# Altium PCB RelayBord.PcbDoc (part 1 of 2)
Units mm, origin at the board's own origin, x right, y up, seen from the top; angles counter-clockwise.
Board outline 155 x 100 mm, 2 copper layers (Top Layer, Bottom Layer); 259 components, 185 nets, 772 pads, 92 vias.
Unrouted connection lines stored in the file: 1.
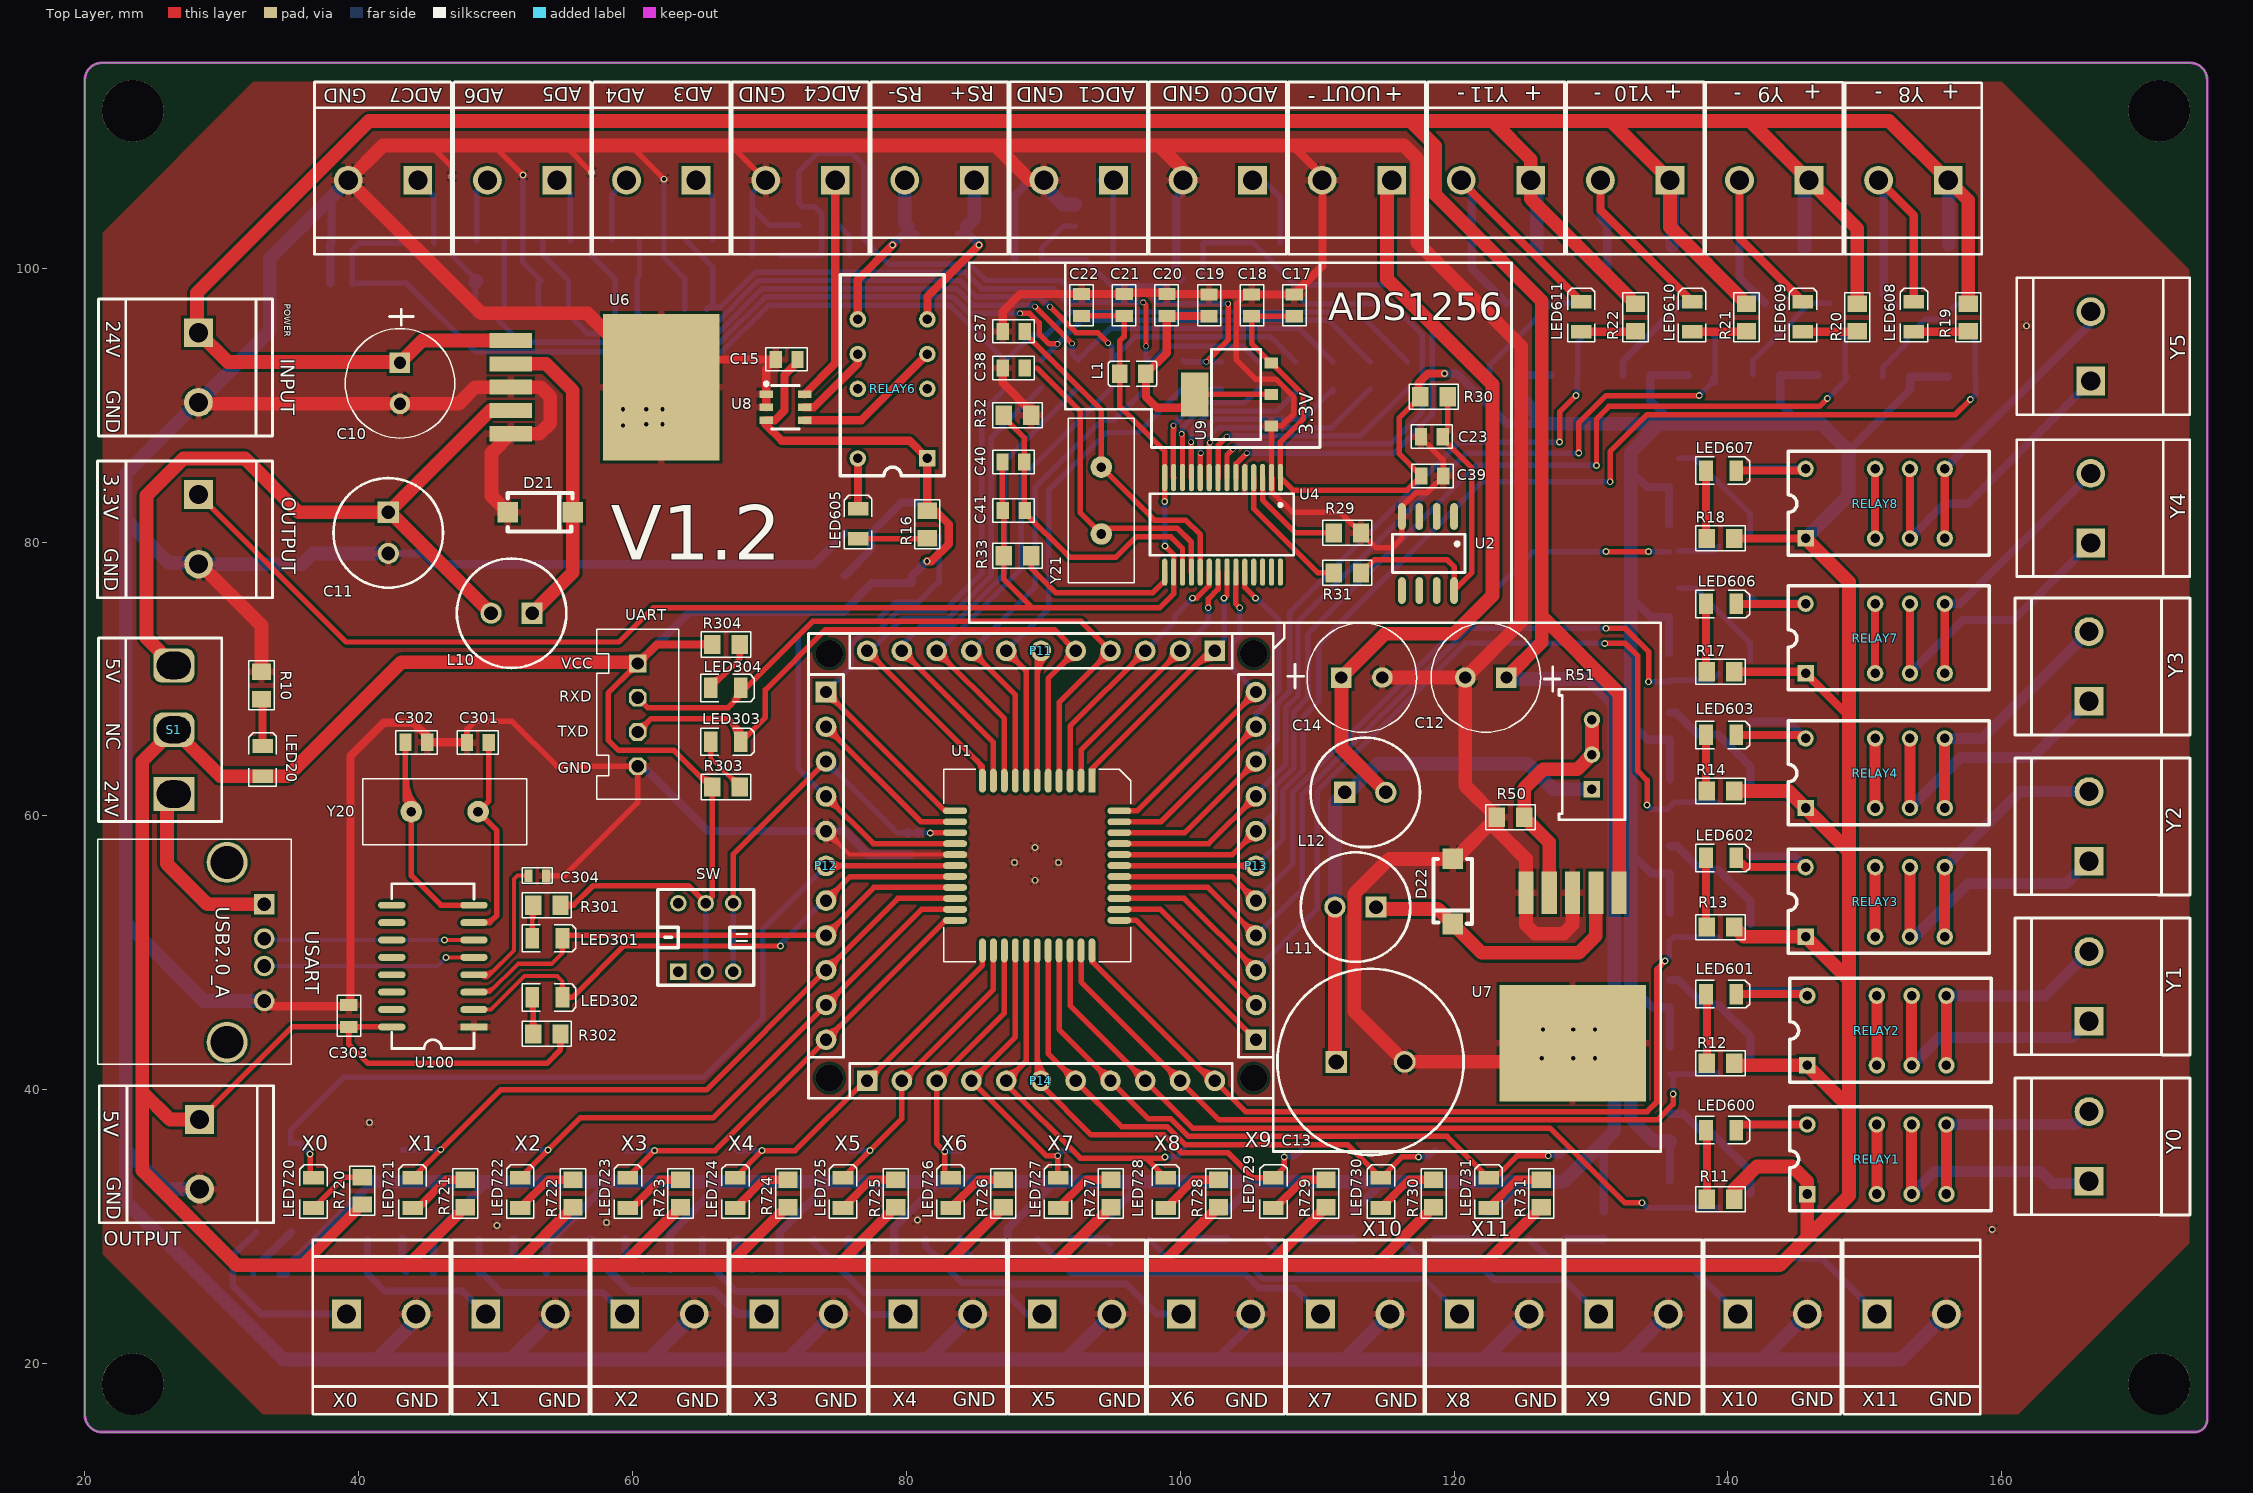
[diagram p0: Top Layer view]
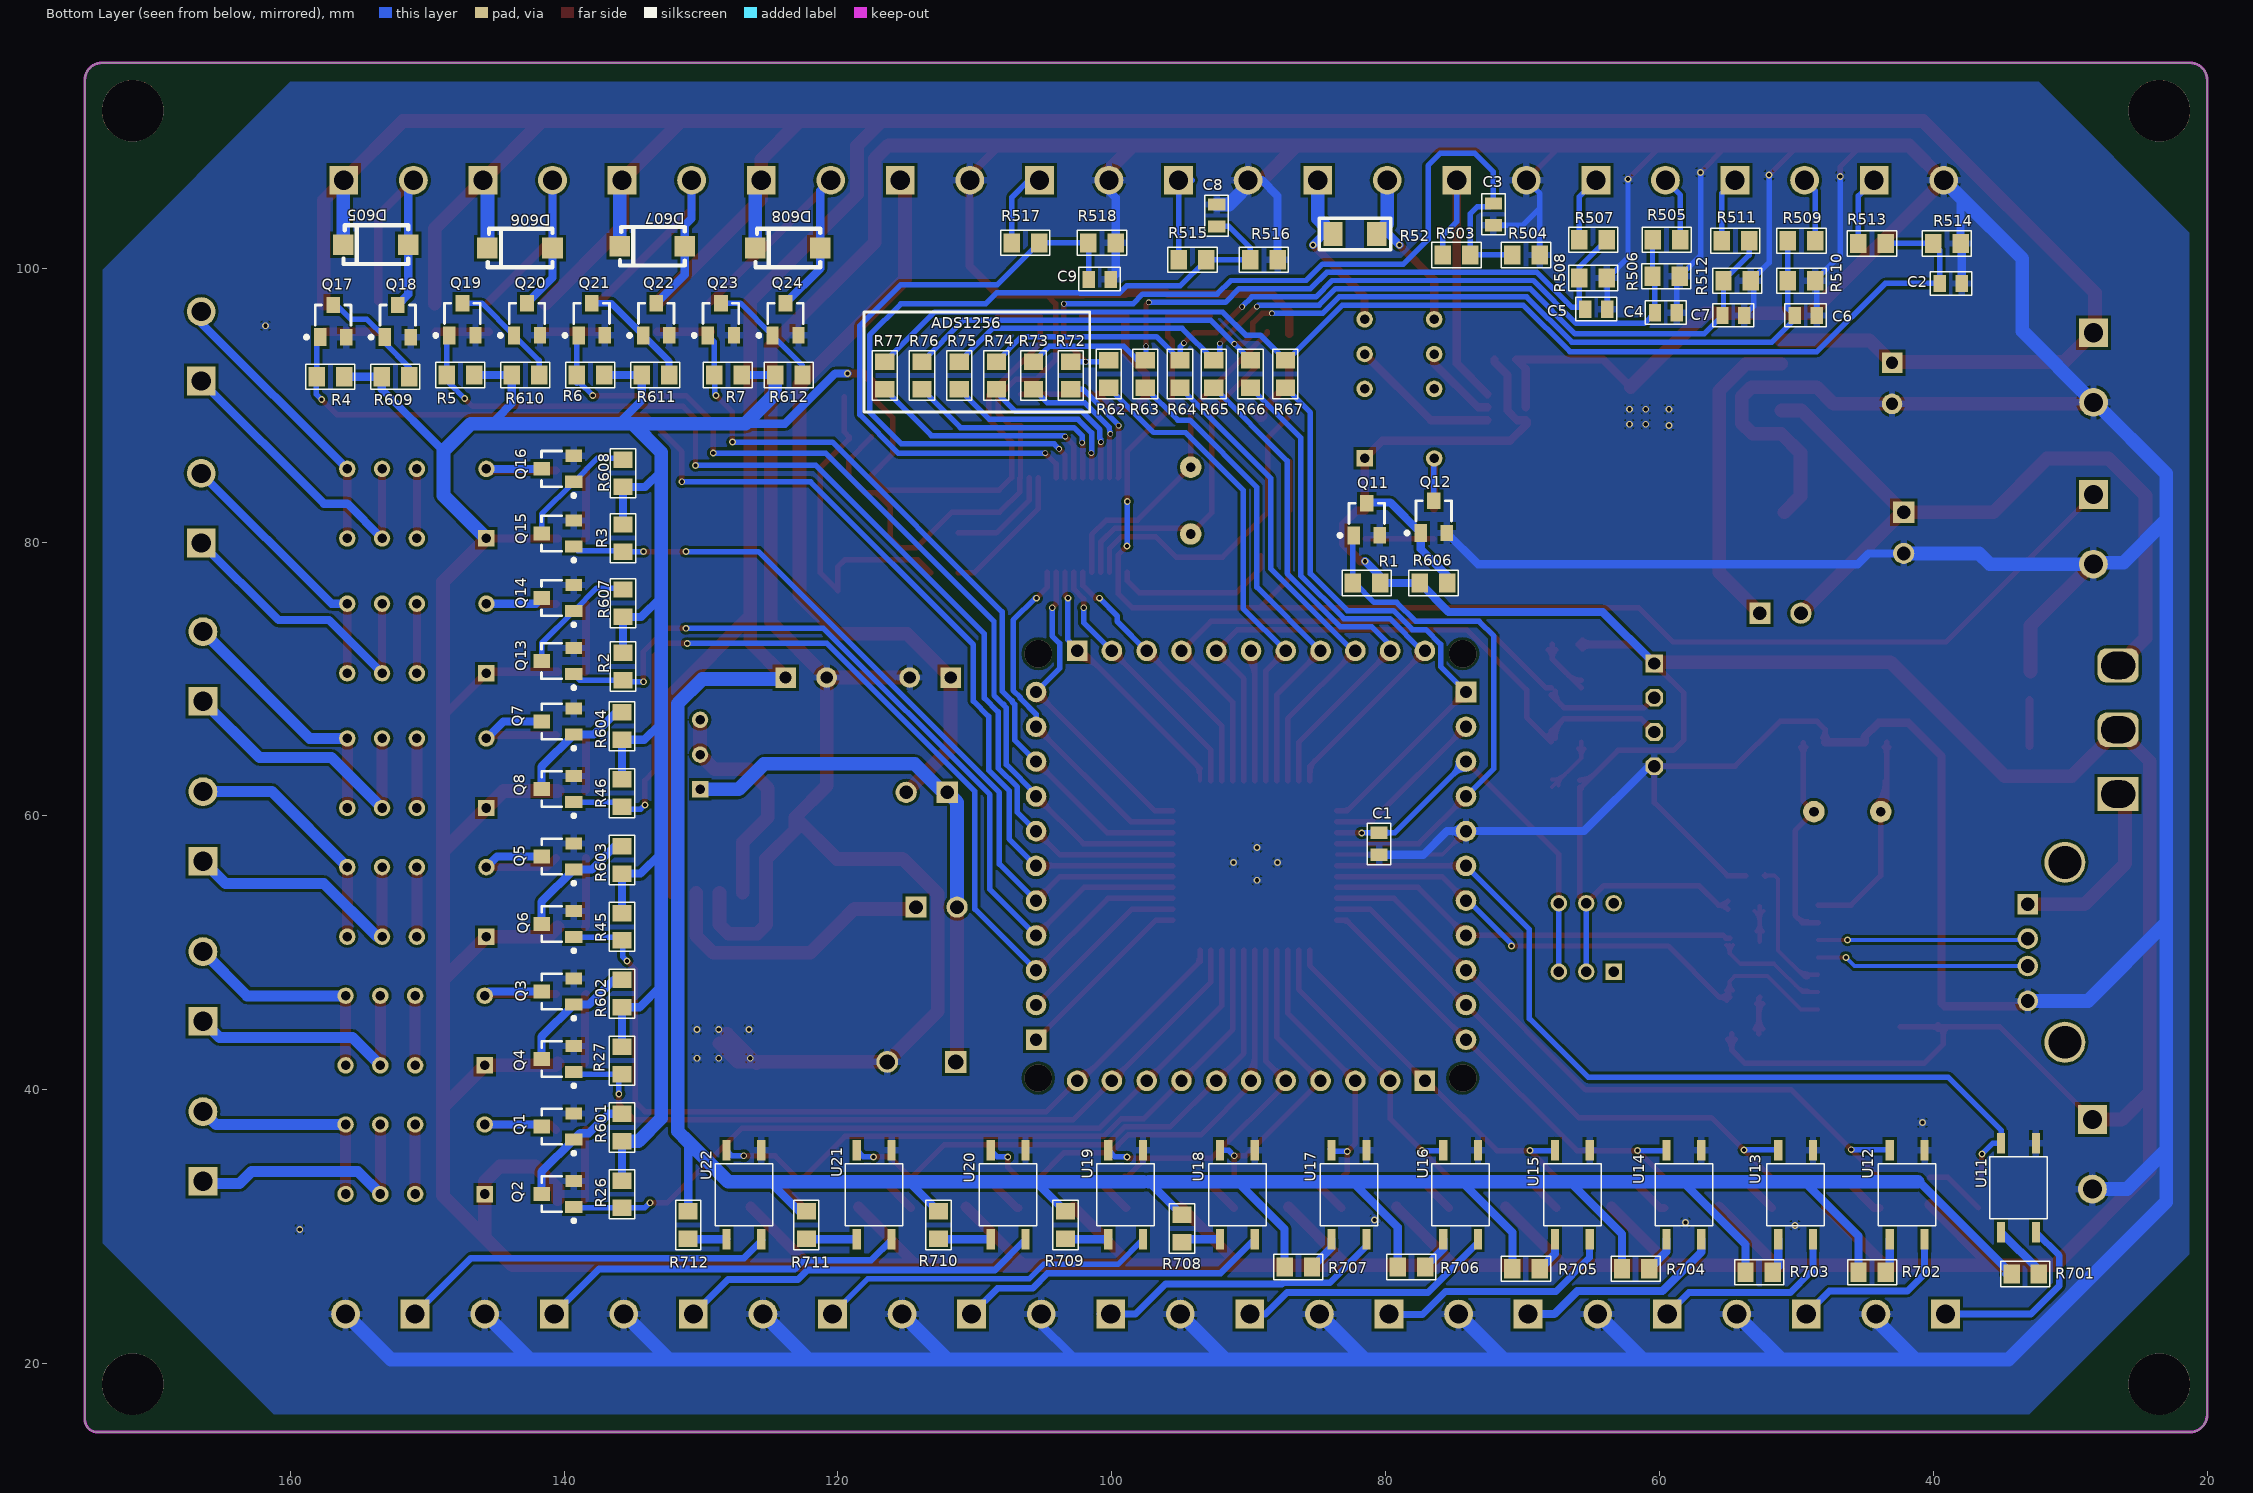
[diagram p1: Bottom Layer view, seen from below]

## Layer stack, top to bottom
Top Layer: signal copper 0.0356
Dielectric: dielectric 0.32, FR-4, Dk 4.8
Bottom Layer: signal copper 0.0356

## Board outline
21.27,115 173.73,115 cw(c173.73,113.73) 175,113.73 175,15.923 cw(c174.077,15.923) 174.077,15 21.27,15 cw(c21.27,16.27) 20,16.27 20,113.73 cw(c21.27,113.73) 21.27,115

## Design rules (kind name [scope] priority, off if disabled: settings)
Clearance [All] p1: gap=0.2
PlaneConnect [All] p1: planeconnectstyle=Relief reliefexpansion=0.508 reliefentries=4 reliefconductorwidth=0.5 reliefairgap=0.254
PolygonConnect [All] p1: connectstyle=Relief reliefconductorwidth=0.5 reliefentries=4 polygonreliefangle="90 Angle"
RoutingVias [All] p1: holewidth=0.711 width=1.27 viastyle="Through Hole" minholewidth=0.711 minwidth=1.27 maxholewidth=0.711 maxwidth=1.27
SilkToSilkClearance [All] p1: silktosilkclearance=0.15
SilkscreenOverComponentPads [All] p1: minsilkscreentomaskgap=0.254
SolderMaskExpansion [All] p1: expansion=0.2
TestPointUsage FabricationTestPointUsage [All] p1: valid=0 allowmultiple=FALSE
Testpoint FabricationTestpoint [All] p1: side=3 testpointundercomponent=TRUE minsize=1.016 maxsize=2.54 preferedsize=1.524 minholesize=0 maxholesize=1.016 preferedholesize=0.813 testpointgrid=0.025 style=297 order=0-112345678
Width [All] p1: maxlimit=1 minlimit=0.15 preferedwidth=0.254
21 further rules are at their usual default settings.

## Components (designator, comment, footprint, x,y, rotation, side; value= is the part's Value field where it differs from the comment)
3.3V "Header 2" CON2_1 28.313,83.466 r270 top
5V "Header 2" CON2_1 28.386,37.827 r270 top
AD3 "ADC" CON2_1 64.643,106.426 r180 top
AD5 "ADC" CON2_1 54.483,106.426 r180 top
ADC0 "Header 2" CON2_1 105.283,106.426 r180 top
ADC1 "Header 2" CON2_1 95.123,106.426 r180 top
ADC4 "ADC" CON2_1 74.803,106.426 r180 top
ADC7 "ADC" CON2_1 44.323,106.426 r180 top
C1 "104" C-0805 80.474,58.763 r270 bottom
C2 "104" C-0805 39.526,98.887 r180 bottom
C3 "104" C-0805 72.136,103.124 r90 bottom
C4 "104" C-0805 58.732,96.747 r0 bottom
C5 "104" C-0805 63.812,97.001 r0 bottom
C6 "104" C-0805 48.526,96.547 r0 bottom
C7 "104" C-0805 53.801,96.547 r0 bottom
C8 "104" C-0805 92.329,104.648 r270 bottom
C9 "104" C-0805 100.076,99.187 r0 bottom
C10 "35V/100UF" RB 43.016,93.091 r0 top
C11 "35V/1000UF" L-DIP 42.164,82.169 r0 top
C12 "35V/100UF" RB 123.825,70.104 r270 top
C13 "35V/1000UF" L-DIP2 112.395,42.037 r90 top
C14 "35V/100UF" RB 111.76,70.104 r90 top
C15 "0.1uF" C-0805 72.054,93.335 r180 top
C17 "Cap2" C-0805 108.324,96.483 r90 top
C18 "Cap2" C-0805 105.213,96.483 r90 top
C19 "Cap2" C-0805 102.102,96.483 r90 top
C20 "Cap Semi" C-0805 99.021,98.113 r270 top
C21 "Cap Semi" C-0805 95.91,98.113 r270 top
C22 "Cap Semi" C-0805 92.799,98.113 r270 top
C23 "1uF" C-0805 119.179,87.689 r180 top
C37 "18pF" C-0805 88.646,95.377 r180 top
C38 "18pF" C-0805 88.646,92.71 r180 top
C39 "Cap Semi" C-0805 117.602,84.836 r0 top
C40 "Cap2" C-0805 87.016,85.852 r0 top
C41 "Cap Semi" C-0805 88.646,82.296 r180 top
C301 "22pF" C-0805 49.511,65.353 r180 top
C302 "22pF" C-0805 43.415,65.383 r0 top
C303 "10uF" C-0805 39.278,44.588 r90 top
C304 "0.01uf" C-0603 53.7,55.637 r180 top
D21 "IN5822 /SS310" DO-214AC 50.89,82.169 r0 top
D22 "IN5822 /SS310" DO-214AC 119.906,56.857 r270 top
D605 "IN4007" DO-214AC 151.384,101.727 r0 bottom
D606 "IN4007" DO-214AC 140.843,101.473 r0 bottom
D607 "IN4007" DO-214AC 131.191,101.6 r0 bottom
D608 "IN4007" DO-214AC 121.285,101.473 r0 bottom
L1 "Inductor" L0805 97.498,92.292 r180 top
L10 "100uH" L-DIP 52.668,74.803 r270 top
L11 "150uH" L-DIP 114.3,53.34 r270 top
L12 "20uH" L-DIP 112.014,61.722 r90 top
LED20 "LED-RED" LED-0805 32.98,62.905 r90 top
LED301 "" LED-0805 52.68,51.065 r0 top
LED302 "" LED-0805 52.68,46.747 r0 top
LED303 "" LED-0805 65.71,65.413 r0 top
LED304 "" LED-0805 65.71,69.35 r0 top
LED600 "" LED-0805 138.402,37.053 r0 top
LED601 "" LED-0805 138.402,46.99 r0 top
LED602 "" LED-0805 138.402,56.928 r0 top
LED603 "" LED-0805 138.402,65.913 r0 top
LED605 "LED" LED-0805 76.476,80.233 r90 top
LED606 "LED" LED-0805 138.402,75.478 r0 top
LED607 "LED" LED-0805 138.402,85.217 r0 top
LED608 "LED" LED-0805 153.575,95.359 r90 top
LED609 "LED" LED-0805 145.479,95.359 r90 top
LED610 "LED" LED-0805 137.382,95.359 r90 top
LED611 "LED" LED-0805 129.286,95.359 r90 top
LED720 "LED" LED-0805 36.703,31.369 r90 top
LED721 "LED" LED-0805 43.942,31.369 r90 top
LED722 "LED" LED-0805 51.799,31.369 r90 top
LED723 "LED" LED-0805 59.657,31.369 r90 top
LED724 "LED" LED-0805 67.514,31.369 r90 top
LED725 "LED" LED-0805 75.372,31.369 r90 top
LED726 "LED" LED-0805 83.229,31.369 r90 top
LED727 "LED" LED-0805 91.087,31.369 r90 top
LED728 "LED" LED-0805 98.944,31.369 r90 top
LED729 "LED" LED-0805 106.801,31.369 r90 top
LED730 "LED" LED-0805 114.659,31.369 r90 top
LED731 "LED" LED-0805 122.516,31.369 r90 top
P11 "" HDR1X11 102.53,72.05 r180 top
P12 "" HDR1X11 74.13,69.05 r270 top
P13 "" HDR1X11 105.53,43.65 r90 top
P14 "" HDR1X11 77.13,40.65 r0 top
POWER "Power Input" CON2_1 28.3,95.283 r270 top
Q1 "2N2222" SOT23A 140.462,37.315 r90 bottom
Q2 "2N2222" SOT23A 140.462,32.385 r90 bottom
Q3 "2N2222" SOT23A 140.462,47.175 r90 bottom
Q4 "2N2222" SOT23A 140.462,42.245 r90 bottom
Q5 "2N2222" SOT23A 140.462,57.035 r90 bottom
Q6 "2N2222" SOT23A 140.462,52.105 r90 bottom
Q7 "2N2222" SOT23A 140.462,66.894 r90 bottom
Q8 "2N2222" SOT23A 140.462,61.964 r90 bottom
Q11 "2N2222" SOT23A 81.383,81.661 r180 bottom
Q12 "2N2222" SOT23A 76.486,81.834 r180 bottom
Q13 "2N2222" SOT23A 140.464,71.316 r90 bottom
Q14 "2N2222" SOT23A 140.464,75.909 r90 bottom
Q15 "2N2222" SOT23A 140.464,80.628 r90 bottom
Q16 "2N2222" SOT23A 140.464,85.348 r90 bottom
Q17 "2N2222" SOT23A 156.861,96.139 r180 bottom
Q18 "2N2222" SOT23A 152.141,96.139 r180 bottom
Q19 "2N2222" SOT23A 147.422,96.266 r180 bottom
Q20 "2N2222" SOT23A 142.703,96.266 r180 bottom
Q21 "2N2222" SOT23A 137.983,96.266 r180 bottom
Q22 "2N2222" SOT23A 133.264,96.266 r180 bottom
Q23 "2N2222" SOT23A 128.544,96.266 r180 bottom
Q24 "2N2222" SOT23A 123.825,96.266 r180 bottom
R1 "2K" R0805 82.386,77.008 r180 bottom
R2 "2K" R0805 135.7,69.917 r90 bottom
R3 "2K" R0805 135.7,79.28 r90 bottom
R4 "2K" R0805 158.057,92.075 r180 bottom
R5 "2K" R0805 148.567,92.202 r180 bottom
R6 "2K" R0805 139.077,92.202 r180 bottom
R7 "2K" R0805 129.032,92.202 r180 bottom
R10 "10K" R0805 32.9,70.525 r270 top
R11 "10K" R0805 138.462,32.004 r0 top
R12 "10K" R0805 138.462,41.942 r0 top
R13 "10K" R0805 138.462,51.879 r0 top
R14 "10K" R0805 138.462,61.817 r0 top
R16 "10K" R0805 81.525,82.283 r270 top
R17 "10K" R0805 140.452,70.529 r180 top
R18 "10K" R0805 140.452,80.268 r180 top
R19 "50K" R0805 157.543,97.409 r270 top
R20 "50K" R0805 149.447,97.409 r270 top
R21 "50K" R0805 141.351,97.409 r270 top
R22 "50K" R0805 133.254,97.409 r270 top
R26 "2K" R0805 135.763,31.369 r90 bottom
R27 "2K" R0805 135.763,41.136 r90 bottom
R29 "Res3" R0805 113.203,80.669 r180 top
R30 "Res3" R0805 117.528,90.61 r0 top
R31 "Res3" R0805 113.203,77.748 r180 top
R32 "Res3" R0805 89.116,89.259 r180 top
R33 "Res3" R0805 87.126,78.994 r0 top
R45 "2K" R0805 135.763,50.904 r90 bottom
R46 "2K" R0805 135.763,60.671 r90 bottom
R50 "1K" R0805 125.113,59.905 r180 top
R51 "RPot" "RES POT" 130.066,61.937 r90 top
R52 "0.01" R1206 80.645,102.489 r0 bottom
R62 "Res3" R0805 100.223,91.282 r90 bottom
R63 "Res3" R0805 97.556,91.282 r90 bottom
R64 "Res3" R0805 95.016,91.282 r90 bottom
R65 "Res3" R0805 92.549,91.282 r90 bottom
R66 "Res3" R0805 89.863,91.282 r90 bottom
R67 "Res3" R0805 87.323,91.282 r90 bottom
R72 "Res3" R0805 102.991,91.164 r90 bottom
R73 "Res3" R0805 105.709,91.164 r90 bottom
R74 "Res3" R0805 108.427,91.164 r90 bottom
R75 "Res3" R0805 111.144,91.164 r90 bottom
R76 "Res3" R0805 113.862,91.164 r90 bottom
R77 "Res3" R0805 116.58,91.164 r90 bottom
R301 "10K" R0805 52.74,53.478 r0 top
R302 "10K" R0805 52.74,44.08 r0 top
R303 "10K" R0805 65.837,62.111 r0 top
R304 "10K" R0805 65.837,72.525 r0 top
R503 "10K" R0805 75.819,100.965 r180 bottom
R504 "10K" R0805 70.739,100.965 r180 bottom
R505 "10K" R0805 58.478,102.081 r0 bottom
R506 "10K" R0805 60.51,99.414 r180 bottom
R507 "10K" R0805 65.844,102.081 r180 bottom
R508 "10K" R0805 65.844,99.287 r180 bottom
R509 "10K" R0805 48.636,102.008 r0 bottom
R510 "10K" R0805 50.626,99.087 r180 bottom
R511 "10K" R0805 55.452,102.008 r180 bottom
R512 "10K" R0805 55.325,99.087 r180 bottom
R513 "10K" R0805 45.472,101.806 r180 bottom
R514 "10K" R0805 40.011,101.806 r180 bottom
R515 "10K" R0805 95.097,100.614 r180 bottom
R516 "10K" R0805 89.89,100.614 r180 bottom
R517 "10K" R0805 107.302,101.847 r180 bottom
R518 "10K" R0805 101.714,101.847 r180 bottom
R601 "1K" R0805 135.763,38.243 r270 bottom
R602 "1K" R0805 135.763,46.02 r90 bottom
R603 "1K" R0805 135.763,55.788 r90 bottom
R604 "1K" R0805 135.763,65.555 r90 bottom
R606 "1K" R0805 77.502,77.008 r180 bottom
R607 "1K" R0805 135.7,74.535 r90 bottom
R608 "1K" R0805 135.7,84.026 r90 bottom
R609 "1K" R0805 153.312,92.075 r180 bottom
R610 "1K" R0805 143.822,92.202 r180 bottom
R611 "1K" R0805 134.331,92.202 r180 bottom
R612 "1K" R0805 124.587,92.202 r180 bottom
R701 "2K" R0805 34.29,26.543 r180 bottom
R702 "2K" R0805 45.466,26.67 r180 bottom
R703 "2K" R0805 53.721,26.67 r180 bottom
R704 "2K" R0805 62.738,26.924 r180 bottom
R705 "2K" R0805 70.739,26.924 r180 bottom
R706 "2K" R0805 79.121,27.051 r180 bottom
R707 "2K" R0805 87.376,27.051 r180 bottom
R708 "2K" R0805 94.869,30.861 r270 bottom
R709 "2K" R0805 103.378,31.115 r270 bottom
R710 "2K" R0805 112.649,31.115 r270 bottom
R711 "2K" R0805 122.301,31.115 r270 bottom
R712 "2K" R0805 130.937,31.115 r270 bottom
R720 "10K" R0805 40.259,31.623 r90 top
R721 "10K" R0805 47.791,31.429 r90 top
R722 "10K" R0805 55.648,31.429 r90 top
R723 "10K" R0805 63.506,31.429 r90 top
R724 "10K" R0805 71.363,31.429 r90 top
R725 "10K" R0805 79.22,31.429 r90 top
R726 "10K" R0805 87.078,31.429 r90 top
R727 "10K" R0805 94.935,31.429 r90 top
R728 "10K" R0805 102.793,31.429 r90 top
R729 "10K" R0805 110.65,31.429 r90 top
R730 "10K" R0805 118.508,31.429 r90 top
R731 "10K" R0805 126.365,31.429 r90 top
RELAY1 "G6S-2" G6S-2 150.876,34.925 r270 top
RELAY2 "G6S-2" G6S-2 150.876,44.323 r270 top
RELAY3 "G6S-2" G6S-2 150.749,53.721 r270 top
RELAY4 "G6S-2" G6S-2 150.749,63.119 r270 top
RELAY6 "G6S-2" G6S-2 78.994,91.186 r0 top
RELAY7 "G6S-2" G6S-2 150.749,72.962 r270 top
RELAY8 "G6S-2" G6S-2 150.749,82.804 r270 top
RS "ADC" CON2_1 84.963,106.426 r180 top
S1 "SW-SPDT_2" SW_1 26.501,61.593 r90 top
SW "SW" SW 61.849,47.625 r0 top
U1 "STC15F2K60S2_QFP44" PQFP44 93.555,62.573 r270 top
U2 "LM285D-2.5" LM285D-2.5 119.998,81.868 r180 top
U4 "ADS1256" ADS1256 107.315,84.709 r180 top
U6 "LM2576" LM2576 56.605,91.313 r0 top
U7 "LM2576-ADJ" LM2576 128.651,48.895 r270 top
U8 "MAX4173" MAX4173 69.768,90.795 r270 top
U9 "LM1117-3.3" AMS1117 106.642,88.482 r90 top
U11 "EL357" EL357 35.052,29.591 r90 bottom
U12 "EL357" EL357 43.18,29.083 r90 bottom
U13 "EL357" EL357 51.333,29.083 r90 bottom
U14 "EL357" EL357 59.487,29.083 r90 bottom
U15 "EL357" EL357 67.64,29.083 r90 bottom
U16 "EL357" EL357 75.794,29.083 r90 bottom
U17 "EL357" EL357 83.947,29.083 r90 bottom
U18 "EL357" EL357 92.1,29.083 r90 bottom
U19 "EL357" EL357 100.254,29.083 r90 bottom
U20 "EL357" EL357 108.839,29.083 r90 bottom
U21 "EL357" EL357 118.618,29.083 r90 bottom
U22 "EL357" EL357 128.143,29.083 r90 bottom
U100 "CH340G" CH340G 48.422,44.588 r180 top
UART "Header 4" CON4_2 60.376,71.128 r270 top
UOUT "Header 2" CON2_1 115.443,106.426 r180 top
USART "USB" USB2.0_A 31.75,50.038 r180 top
X0 "XH2.54" CON2_1 39.116,23.622 r0 top
X1 "XH2.54" CON2_1 49.276,23.622 r0 top
X2 "XH2.54" CON2_1 59.436,23.622 r0 top
X3 "XH2.54" CON2_1 69.596,23.622 r0 top
X4 "XH2.54" CON2_1 79.756,23.622 r0 top
X5 "XH2.54" CON2_1 89.916,23.622 r0 top
X6 "XH2.54" CON2_1 100.076,23.622 r0 top
X7 "XH2.54" CON2_1 110.236,23.622 r0 top
X8 "XH2.54" CON2_1 120.396,23.622 r0 top
X9 "XH2.54" CON2_1 130.556,23.622 r0 top
X10 "XH2.54" CON2_1 140.716,23.622 r0 top
X11 "XH2.54" CON2_1 150.876,23.622 r0 top
Y0 "Header 2" CON2_1 166.37,33.325 r90 top
Y1 "Header 2" CON2_1 166.37,45.009 r90 top
Y2 "Header 2" CON2_1 166.37,56.693 r90 top
Y3 "Header 2" CON2_1 166.37,68.377 r90 top
Y4 "Header 2" CON2_1 166.497,79.937 r90 top
Y5 "Header 2" CON2_1 166.497,91.756 r90 top
Y8 "Header 2" CON2_1 156.083,106.426 r180 top
Y9 "Header 2" CON2_1 145.923,106.426 r180 top
Y10 "Header 2" CON2_1 135.763,106.426 r180 top
Y11 "Header 2" CON2_1 125.603,106.426 r180 top
Y20 "12MHz" XTAL1 48.722,60.311 r180 top
Y21 "7.68MHz" XTAL1 94.234,85.471 r270 top

## Footprints (in the part's own frame and the unit in brackets; to place one, negate y for a bottom-side part, rotate by r counter-clockwise, add the part's x,y. Pads: shape width x height; smd on the part's side, far side on the other; paste and mask are expansions set on the pad)
ADS1256 [mm] "SSOP-28"
  oval 0.38x2 smd: 1(0,0) 2(0.65,0) 3(1.3,0) 4(1.95,0) 5(2.6,0) 6(3.25,0) 7(3.9,0) 8(4.55,0) 9(5.2,0) 10(5.85,0) 11(6.5,0) 12(7.15,0) 13(7.8,0) 14(8.45,0) 15(8.45,6.9) 16(7.8,6.9) 17(7.15,6.9) 18(6.5,6.9) 19(5.85,6.9) 20(5.2,6.9) 21(4.55,6.9) 22(3.9,6.9) 23(3.25,6.9) 24(2.6,6.9) 25(1.95,6.9) 26(1.3,6.9) 27(0.65,6.9) 28(0,6.9)
  silkscreen extent -0.97,1.17 9.53,5.68
AMS1117 [mm] "SOT-223"
  rect 0.8x1 smd: 1(0,0) 2(2.3,0) 3(4.6,0)
  rect 3.2x2 smd: 4(2.3,5.588)
  silkscreen extent -1,0.76 5.6,4.36
C-0603 [mm] "SMT 1.6*0.81*0.25"
  rect 0.6x0.9 smd: 1(0,0) 2(1.3,0)
  silkscreen extent -0.45,-0.57 1.76,0.56
C-0805 [mm] "SMT"
  rect 0.9x1.25 smd: 1(0,0) 2(1.6,0)
  silkscreen extent -0.69,-0.87 2.32,0.84
CH340G [mm]
  rect 2x0.5 smd: 1(0,0)
  oval 2x0.5 smd: 2(0,-1.27) 3(0,-2.54) 4(0,-3.81) 5(0,-5.08) 6(0,-6.35) 7(0,-7.62) 8(0,-8.89) 9(6,-8.89) 10(6,-7.62) 11(6,-6.35) 12(6,-5.08) 13(6,-3.81) 14(6,-2.54) 15(6,-1.27) 16(6,0)
  silkscreen extent 0,-10.46 6,1.57
CON2_1 [mm] "间距 5."
  rect 2.1x2.1 hole 1.4: 1(0,0)
  round 2.1 hole 1.4: 2(5.08,0)
  silkscreen extent -2.46,-5.3 7.54,5.4
CON4_2 [mm] "XH2.54"
  rect 1.3x1.3 hole 0.9: 1(0,0)
  oct 1.3x1.3 hole 0.9: 2(2.5,0) 3(5,0) 4(7.5,0)
  silkscreen extent -2.5,-3 9.9,3
DO-214AC [mm] "SMA"
  rect 1.5x1.5 smd: 1(0,0) 2(4.75,0)
  silkscreen extent 0,-1.41 4.73,1.41
EL357 [mm]
  round 0.6 on Bottom Overlay: 0(1.5,0.2)
  rect 1.5x0.6 smd: 1(0,0) 2(0,-2.54) 3(6.5,-2.54) 4(6.5,0)
  silkscreen extent 1,-3.37 5.5,0.83
G6S-2 [mm]
  round 1.2 hole 0.7: 1(-2.54,-5.08) 3(-2.54,2.54) 4(2.54,2.54) 5(-2.54,0) 6(2.54,0) 7(-2.54,5.08) 8(2.54,5.08)
  rect 1.2x1.2 hole 0.7: 2(2.54,-5.08)
  silkscreen extent -3.83,-6.35 3.77,8.35
HDR1X11 [mm] "Connector; Header; 11 Position"
  rect 1.5x1.5 hole 0.9: 1(0,0)
  round 1.5 hole 0.9: 2(2.54,0) 3(5.08,0) 4(7.62,0) 5(10.16,0) 6(12.7,0) 7(15.24,0) 8(17.78,0) 9(20.32,0) 10(22.86,0) 11(25.4,0)
  silkscreen extent -1.27,-1.27 26.67,1.27
L0805 [mm]
  rect 1.133x1.377 smd: 1(0,0) 2(1.932,0)
  silkscreen extent -0.8,-0.9 2.75,0.9
L-DIP [mm] "6*8 0608"
  rect 1.55x1.55 hole 1: 1(0,0)
  round 1.55 hole 1: 2(0,-3)
  silkscreen extent -4,-5.5 4,2.5
L-DIP2 [mm] "9.5*13   间距5"
  rect 1.6x1.6 hole 1.1: 1(0,1)
  round 1.6 hole 1.1: 2(0,-4)
  silkscreen extent -6.8,-8.3 6.8,5.3
LED-0805 [mm] "SMT LED; 2 Flat Leads"
  rect 1x1.5 smd: 1(0,0) 2(2.2,0)
  silkscreen extent -0.74,-1 3.17,1
LM285D-2.5 [mm] "SOIC-8"
  oval 0.568x1.95 smd: 1(0,0) 2(1.27,0) 3(2.54,0) 4(3.81,0) 5(3.81,5.41) 6(2.54,5.41) 7(1.27,5.41) 8(0,5.41)
  silkscreen extent -0.8,1.3 4.5,4.1
LM2576 [mm]
  rect 3.1x1.1 smd: 1(-5.5,3.404) 2(-5.5,1.702) 3(-5.5,0) 4(-5.5,-1.702) 5(-5.5,-3.404)
  rect 8.5x10.7 smd: 6(5.5,0)
MAX4173 [mm] "0.5*1,间距0.95"
  rect 0.55x1 smd: 1(0,0) 2(0.95,0) 3(1.9,0) 4(1.9,2.8) 5(0.95,2.8) 6(0,2.8)
  silkscreen extent -0.89,-0.13 2.54,2.41
PQFP44 [mm]
  rect 1.75x0.5 smd: 1(0,0)
  oval 1.75x0.5 smd: 2(0,-0.8) 3(0,-1.6) 4(0,-2.4) 5(0,-3.2) 6(0,-4) 7(0,-4.8) 8(0,-5.6) 9(0,-6.4) 10(0,-7.2) 11(0,-8) 23(12.4,-8) 24(12.4,-7.2) 25(12.4,-6.4) 26(12.4,-5.6) 27(12.4,-4.8) 28(12.4,-4) 29(12.4,-3.2) 30(12.4,-2.4) 31(12.4,-1.6) 32(12.4,-0.8) 33(12.4,0)
  oval 0.5x1.75 smd: 12(2.2,-10) 13(3,-10) 14(3.8,-10) 15(4.6,-10) 16(5.4,-10) 17(6.2,-10) 18(7,-10) 19(7.8,-10) 20(8.6,-10) 21(9.4,-10) 22(10.2,-10) 34(10.2,2) 35(9.4,2) 36(8.6,2) 37(7.8,2) 38(7,2) 39(6.2,2) 40(5.4,2) 41(4.6,2) 42(3.8,2) 43(3,2) 44(2.2,2)
  silkscreen extent -0.82,-10.83 13.23,2.83
R0805 [mm]
  rect 1.2x1.4 smd: 1(0,0) 2(2,0)
  silkscreen extent -0.8,-0.92 2.79,0.92
R1206 [mm]
  rect 1.4x1.75 smd: 1(0,0) 2(3.2,0)
  silkscreen extent -1.02,-1.14 4.19,1.14
RB [mm] "6mm*8mm"
  rect 1.5x1.5 hole 0.9: 1(0,0)
  round 1.5 hole 0.9: 2(0,-3)
  silkscreen extent -4,-5.5 4,3.89
"RES POT" [mm] "Hole size:0.7mm      space:2.54mm"
  rect 1.2x1.2 hole 0.7: 1(0,0)
  round 1.2 hole 0.7: 2(2.54,0) 3(5.08,0)
  silkscreen extent -2.22,-2.42 7.31,2.41
SOT23A [mm] "SOT-23; 3 Leads; Body 3.0 x 2.5 mm, inc. leads (LxW max)"
  rect 0.9x1.3 smd: 1(-0.95,-1.175)
  rect 0.9x1.2 smd: 2(0.95,-1.175)
  rect 1x1.2 smd: 3(0,1.175)
  silkscreen extent -2.07,-1.3 1.3,1.18
SW [mm] "Hole size 0.75,  间距x:2mm ,y:5mm"
  rect 1.2x1.2 hole 0.75: 1(1.5,1)
  round 1.2 hole 0.762: 2(3.5,1) 3(5.5,1) 4(1.5,6) 5(3.5,6) 6(5.5,6)
  silkscreen extent 0,0 7,7
SW_1 [mm] "ҡͷ"
  rect 2.5x3 hole 2 slot 2.5 at 90 deg: 1(0,0)
  rrect50% 2.5x3 hole 2 slot 2.5 at 90 deg: 2(4.7,0) 3(9.4,0)
  silkscreen extent -2,-3.5 11.4,3.5
USB2.0_A [mm] "USB2.0 ĸ?"
  rect 1.5x1.5 hole 1: 1(-1.355,-3.5)
  round 1.5 hole 1: 2(-1.355,-1) 3(-1.355,1) 4(-1.355,3.55)
  round 3 hole 2.4: NC(1.355,6.57) NC(1.355,-6.57)
  silkscreen extent -3.33,-8.25 10.81,8.18
XTAL1 [mil]
  round 62 hole 28: 1(0,0) 2(192.13,0)
  silkscreen extent -140,-94 332,94

## Part data
3.3V 5V ADC0 ADC1 UOUT Y0 Y1 Y2 Y3 Y4 Y5 Y8 Y9 Y10 Y11: "Header, 2-Pin"
AD3 AD5 ADC4 ADC7 RS X0 X1 X2 X3 X4 X5 X6 X7 X8 X9 X10 X11: library part "Header 2", "Header, 2-Pin"
C1 C2 C3 C4 C5 C6 C7 C8 C9 C15 C23 C37 C38 C301 C302 C303 C304: library part CAP1
C10 C11 C12 C13 C14: library part CAP2
C17 C18 C19 C40: "Capacitor"
C20 C21 C22 C39 C41: "Capacitor (Semiconductor SIM Model)"
D21 D22: library part "DIODE SCHOTTKY", "Schottky Diode"
D605 D606 D607 D608: library part DIODE, "Diode"
L10 L11 L12: library part Inductor, "Inductor"
LED20: library part LED0, "Typical INFRARED GaAs LED"
LED301 LED302 LED303 LED304 LED600 LED601 LED602 LED603: library part LED
P11 P12 P13 P14: library part "Header 11", "Header, 11-Pin"
POWER: library part CON2
Q1 Q2 Q3 Q4 Q5 Q6 Q7 Q8 Q11 Q12 Q13 Q14 Q15 Q16 Q17 Q18 Q19 Q20 Q21 Q22 Q23 Q24: library part NPN_S8050, "NPN Transistor"
R1 R2 R3 R4 R5 R6 R7 R11 R12 R13 R14 R16 R17 R18 R19 R20 R21 R22 R26 R27 R45 R46 R50 R52 R503 R504 R505 R506 R507 R508 R509 R510 R511 R512 R513 R514 R515 R516 R517 R518 R601 R602 R603 R604 R606 R607 R608 R609 R610 R611 R612 R701 R702 R703 R704 R705 R706 R707 R708 R709 R710 R711 R712 R720 R721 R722 R723 R724 R725 R726 R727 R728 R729 R730 R731: library part RES
R10: library part "Res Semi", "Semiconductor Resistor"
R29 R30 R31 R32 R33 R62 R63 R64 R65 R66 R67 R72 R73 R74 R75 R76 R77: "Resistor"
R51: "Potentiometer"
R301 R302 R303 R304: library part Res3, "Resistor"
RELAY1 RELAY2 RELAY3 RELAY4 RELAY6 RELAY7 RELAY8: library part RELAY-G6S-2
S1: "SPDT Subminiature Toggle Switch, Right Angle Mounting, Vertical Actuation"
U7: library part LM2576
U11 U12 U13 U14 U15 U16 U17 U18 U19 U20 U21 U22: library part Optoisolator, "4-Pin Phototransistor Optocoupler"
UART: "Header, 4-Pin"
USART: library part "Header 4", "Header, 4-Pin"
Y20: library part CRYSTAL, "Crystal"
Y21: library part XTAL, "Crystal Oscillator"

## Free pads (board coordinates)
  round 4.5 hole 4.5: 0(23.5,18.5) 1(171.5,18.5) 2(171.5,111.5) 3(23.5,111.5)

## Via types
v1: diameter 0.5, hole 0.3, Top Layer to Bottom Layer, 70 vias
v2: diameter 0.4, hole 0.3, Top Layer to Bottom Layer, 18 vias
v3: diameter 2, hole 2, Top Layer to Bottom Layer, 4 vias

## Nets (pads, with @x,y where several pads share a name; then routed paths per layer and width w, separated by ;. In a path a pad name is that pad's centre, name@x,y a point inside that pad or via, vN(x,y) a via of type N, cw(c..) or ccw(c..) an arc to the next point about the centre after c; other vN are vias at no path point)
3.3DVCC: 3.3V.1 C21.2 C22.2 C40.1 C41.2 L1.2 R33.1 U4.14 U4.16 | length 114
  Top Layer w0.4: 3.3V.1@28.213,83.566 3.3V.1@28.313,83.466 39.079,72.7 59,72.7 61.5,75.2 89.2,75.2 ; C40.1@87.016,85.852 87.016,82.326 87.126,82.216 R33.1@87.126,78.994 87.126,77.274 89.2,75.2 ; C22.2@92.799,96.513 C21.2@95.91,96.513 95.91,95.01 95.566,94.666 L1.2@95.566,92.292 95.566,89.934 98.865,86.635 U4.14@98.865,84.709 v1(98.865,82.965) ; v1(98.9,79.7) 99.515,79.085 U4.16@99.515,77.809 99.515,76.215 98.5,75.2 89.2,75.2
  Bottom Layer w0.4: v1(98.865,82.965) 98.865,79.735 v1(98.9,79.7)
AD2: C3.2 R62.2 R72.2 R503.2 R504.1 | length 57.8
  Top Layer w0.4: v2(101.9,93.164) 103.5,94.764 v2(103.5,97.4)
  Bottom Layer w0.4: R504.1@70.739,100.965 R503.2@73.819,100.965 73.819,103.981 73.3,104.5 72.401,104.5 72.177,104.724 C3.2@72.136,104.724 72.136,107.036 73.5,108.4 76,108.4 76.9,107.5 76.9,102.1 78.7,100.3 84.6,100.3 85.8,99.1 91.3,99.1 92.3,98.1 97.749,98.1 98.449,97.4 v2(103.5,97.4) ; R62.2@100.223,93.282 100.341,93.164 v2(101.9,93.164) R72.2@102.991,93.164
AD3: C5.2 R63.2 R73.2 R507.2 R508.1 | length 52.7
  Top Layer w0.4: v2(97.3,97.5) 97.5,97.3 v2(97.5,94.3)
  Bottom Layer w0.4: R507.2@63.844,102.081 65.844,100.081 R508.1@65.844,99.287 C5.2@65.844,97.433 ; C5.2@65.412,97.001 65.567,97.156 66.414,97.156 68.957,99.7 84.3,99.7 85.5,98.5 90.697,98.5 91.697,97.5 v2(97.3,97.5) ; v2(97.5,94.3) 97.5,93.338 R63.2@97.556,93.282 98.123,93.282 99.123,94.282 104.591,94.282 R73.2@105.709,93.164
AD4: C4.2 R64.2 R74.2 R505.2 R506.1 | length 59.6
  Top Layer w0.4: v2(90.486,97.186) 92.371,95.3 93.962,95.3 v2(94.731,94.531)
  Bottom Layer w0.4: R505.2@60.478,102.081 60.51,102.049 R506.1@60.51,99.414 60.332,99.236 C4.2@60.332,96.747 61.103,95.976 66.082,95.976 69.206,99.1 83.9,99.1 85.1,97.9 89.771,97.9 v2(90.486,97.186) ; v2(94.731,94.531) 95.016,94.246 R64.2@95.016,93.282 96.734,95 106.591,95 R74.2@108.427,93.164
AD5: C7.2 R65.2 R75.2 R511.2 R512.1 | length 68.6
  Top Layer w0.4: v2(89.4,97.2) v2(92.1,94.5)
  Bottom Layer w0.4: R511.2@53.452,102.008 53.452,100.96 R512.1@55.325,99.087 C7.2@55.325,96.623 ; C7.2@55.401,96.547 C7.2@55.325,96.623 ; v2(89.4,97.2) 89.3,97.3 84.851,97.3 83.651,98.5 69.454,98.5 66.154,95.2 56.748,95.2 C7.2@55.325,96.623 ; v2(92.1,94.5) 92.1,93.731 R65.2@92.549,93.282 94.867,95.6 108.708,95.6 R75.2@111.144,93.164
AD6: C6.2 R66.2 R76.2 R509.2 R510.1 | length 77.3
  Top Layer w0.4: v2(88.3,96.7) 89,96.7 89.7,96 89.7,95.2 90.431,94.469 v2(91.05,94.469)
  Bottom Layer w0.4: C6.2@49.989,96.411 51.8,94.6 66.403,94.6 69.703,97.9 83.403,97.9 84.603,96.7 v2(88.3,96.7) ; C6.2@50.089,96.511 C6.2@50.126,96.547 50.626,97.047 R510.1@50.626,99.087 50.626,101.998 R509.2@50.636,102.008 ; R66.2@89.863,93.282 92.781,96.2 110.826,96.2 R76.2@113.862,93.164
AD7: C2.1 R67.2 R77.2 R513.2 R514.1 | length 91.8
  Bottom Layer w0.4: C2.1@39.526,98.774 39.526,101.321 R514.1@40.011,101.806 R513.2@43.472,101.806 ; C2.1@39.526,98.887 43.513,98.887 48.5,93.9 66.551,93.9 69.951,97.3 83.154,97.3 87.172,93.282 R67.2@87.323,93.282 89.143,95.102 90.202,95.102 91.9,96.8 112.944,96.8 R77.2@116.58,93.164
ADC2: P11.7 R62.1 U1.7 | length 38.6
  Top Layer w0.4: P11.7@87.29,71.5 cw(c87.29,70.172) 88.229,71.111 cw(c89.168,72.05) P11.7@87.84,72.05 ; P11.7@87.29,72.05 88.755,70.585 U1.7@88.755,62.573
  Bottom Layer w0.4: P11.7@86.872,72.05 P11.7@87.29,72.05 ; P11.7@87.372,72.05 P11.7@87.29,72.05 ; R62.1@100.223,91.282 96.941,88 94.6,88 90.4,83.8 90.4,75.16 P11.7@87.29,72.05
ADC3: P11.8 R63.1 U1.8 | length 38.2
  Top Layer w0.4: P11.8@84.75,71.5 cw(c84.75,70.172) 85.689,71.111 cw(c86.628,72.05) P11.8@85.3,72.05 ; P11.8@84.75,72.05 87.955,68.845 U1.8@87.955,62.573
  Bottom Layer w0.4: P11.8@84.75,72.05 89.4,76.7 89.4,84 94.3,88.9 95.174,88.9 R63.1@97.556,91.282 R63.1@97.282,91.282
ADC4: P11.9 R64.1 U1.9 | length 38.3
  Top Layer w0.4: P11.9@82.21,71.5 cw(c82.21,70.172) 83.149,71.111 cw(c84.088,72.05) P11.9@82.76,72.05 ; P11.9@82.21,72.05 87.155,67.105 U1.9@87.155,62.573
  Bottom Layer w0.4: P11.9@82.21,72.05 82.396,72.05 88.4,78.054 88.4,84.666 R64.1@95.016,91.282
ADC5: P11.10 R65.1 U1.10 | length 40.2
  Top Layer w0.4: P11.10@79.67,71.5 cw(c79.67,70.172) 80.609,71.111 cw(c81.548,72.05) P11.10@80.22,72.05 ; P11.10@79.67,72.05 86.355,65.365 U1.10@86.355,62.573
  Bottom Layer w0.4: P11.10@79.67,72.05 79.67,72.47 81,73.8 83.297,73.8 87.2,77.703 87.2,85.933 R65.1@92.549,91.282
ADC6: P11.11 R66.1 U1.11 | length 42.6
  Top Layer w0.4: P11.11@77.13,71.5 cw(c77.13,70.172) 78.069,71.111 cw(c79.008,72.05) P11.11@77.68,72.05 ; P11.11@77.13,72.05 85.555,63.625 U1.11@85.555,62.573 ; 85.168,64.012 cw(c84.353,63.198) U1.11@85.505,63.198
  Bottom Layer w0.4: P11.11@76.839,72.05 P11.11@77.13,72.05 ; P11.11@77.338,72.05 79.688,74.4 83.049,74.4 86.2,77.551 86.2,87.619 R66.1@89.863,91.282
ADC7: P12.1 R67.1 U1.12 | length 45.7
  Top Layer w0.4: P12.1@74.13,68.5 cw(c74.13,67.172) 75.069,68.111 cw(c76.008,69.05) P12.1@74.68,69.05 ; P12.1@74.13,69.05 82.807,60.373 U1.12@83.555,60.373 ; 82.635,60.545 ccw(c82.93,60.841) U1.12@82.93,60.423
  Bottom Layer w0.4: P12.1@74.13,69.05 75.98,70.9 75.98,72.526 77.054,73.6 78.039,73.6 79.439,75 82.8,75 85.5,77.7 85.5,89.459 R67.1@87.323,91.282
COM1: RELAY1.3 RELAY1.4 Y0.1 | length 19.2
  Top Layer w0.8: RELAY1.4@153.416,32.385 RELAY1.3@153.416,37.465
  Bottom Layer w0.8: RELAY1.4@153.416,32.385 155.067,34.036 162.814,34.036 163.703,33.147 166.192,33.147 Y0.1@166.37,33.325
COM2: RELAY2.3 RELAY2.4 Y1.1 | length 19.4
  Top Layer w0.8: RELAY2.4@153.416,41.783 RELAY2.3@153.416,46.863
  Bottom Layer w0.8: RELAY2.4@153.416,41.783 155.448,43.815 165.176,43.815 Y1.1@166.37,45.009
COM3: RELAY3.3 RELAY3.4 Y2.1 | length 21
  Top Layer w0.8: RELAY3.4@153.289,51.181 RELAY3.3@153.289,56.261
  Bottom Layer w0.8: RELAY3.4@153.289,51.181 153.67,51.181 157.55,55.061 164.738,55.061 Y2.1@166.37,56.693 Y2.1@165.989,56.312
COM4: RELAY4.3 RELAY4.4 Y3.1 | length 21.4
  Top Layer w0.8: RELAY4.4@153.289,60.579 RELAY4.3@153.289,65.659
  Bottom Layer w0.8: RELAY4.4@153.289,60.579 156.972,64.262 162.255,64.262 Y3.1@166.37,68.377
COM7: RELAY7.3 RELAY7.4 Y4.1 | length 22.9
  Top Layer w0.6: RELAY7.4@153.289,70.421 RELAY7.3@153.289,75.501 ; Y4.1@166.043,80.391 Y4.1@166.497,79.937
  Bottom Layer w0.6: RELAY7.4@153.289,70.421 157.168,74.3 160.86,74.3 Y4.1@166.497,79.937
COM8: RELAY8.3 RELAY8.4 Y5.1 | length 23
  Top Layer w0.6: RELAY8.4@153.289,80.264 RELAY8.3@153.289,85.344
  Bottom Layer w0.6: RELAY8.4@153.289,80.264 155.825,82.8 157.541,82.8 Y5.1@166.497,91.756
D_N: U100.5 USART.3 | length 15.6
  Top Layer w0.3: v1(46.39,49.668) U100.5@48.422,49.668
  Bottom Layer w0.3: USART.3@33.105,49.038 45.76,49.038 v1(46.39,49.668)
D_P: U100.6 USART.2 | length 15.6
  Top Layer w0.3: v1(46.263,50.938) U100.6@48.422,50.938
  Bottom Layer w0.3: USART.2@33.267,51.2 USART.2@33.105,51.038 33.205,50.938 v1(46.263,50.938)
DGND: C40.2 C41.1 R32.2 U4.17 | length 23.3
  Top Layer w0.4: R32.2@87.116,89.259 87.116,89.084 88.616,87.584 C40.2@88.616,85.852 ; C40.2@88.6,85.852 88.6,82.2 91.9,78.9 95.3,78.9 96.8,80.4 99.3,80.4 100.165,79.535 U4.17@100.165,77.809
GND: 3.3V.2 5V.2 ADC0.2 ADC1.2 ADC4.2 ADC7.2 C1.2 C2.2 C3.1 C4.1 C5.1 C6.1 C7.1 C8.1 C9.1 C10.2 C11.2 C12.2 C13.2 C14.2 C15.2 C17.2 C18.2 C19.2 C20.1 C21.1 C22.1 C23.2 C37.2 C38.2 C39.2 C301.2 C302.2 C303.2 C304.1 D21.1 D22.1 P12.5 POWER.2 Q1.2 Q2.2 Q3.2 Q4.2 Q5.2 Q6.2 Q7.2 Q8.2 Q11.2 Q12.2 Q13.2 Q14.2 Q15.2 Q16.2 Q17.2 Q18.2 Q19.2 Q20.2 Q21.2 Q22.2 Q23.2 Q24.2 R10.1 R29.1 R32.1 R50.2 R504.2 R506.2 R508.2 R510.2 R512.2 R514.2 R516.2 R518.2 U1.16 U2.4 U4.2 U4.5 U6.3 U6.5 U6.6 U7.3 U7.5 U7.6 U8.1 U8.2 U9.1 U11.3 U12.3 U13.3 U14.3 U15.3 U16.3 U17.3 U18.3 U19.3 U20.3 U21.3 U22.3 U100.1 UART.4 UOUT.2 USART.4 X0.2 X1.2 X2.2 X3.2 X4.2 X5.2 X6.2 X7.2 X8.2 X9.2 X10.2 X11.2 | length 917.6
  Top Layer w0.3: P12.5@74.13,58.29 cw(c74.13,56.841) 75.154,57.866 cw(c76.179,58.89) P12.5@74.73,58.89 ; P12.5@74.13,58.89 75.847,57.173 U1.16@83.555,57.173
  Top Layer w0.4: 45.5,108.7 46.8,107.4 v1(46.8,106.7) ; C301.2@47.734,65.705 ccw(c47.307,66.132) 47.911,66.132 ccw(c48.515,66.132) C301.2@48.088,65.705 ; C301.2@47.911,65.353 47.911,66.323 48.495,66.907 51.193,66.907 54.472,63.628 UART.4@60.376,63.628 60.376,60.976 55.037,55.637 C304.1@53.7,55.637 ; 49.8,108.966 49.834,108.966 v1(52,106.8) ; 55.2,108.966 55.2,108.8 v1(57,107) ; 60,108.966 60,108.8 v1(62.3,106.5) ; 67.183,108.966 ADC4.2@69.723,106.426 ; C18.2@104.783,98.083 104.1,97.4 104.1,93.3 105.5,91.9 106.99,91.9 108.3,90.59 108.3,89.4 107.382,88.482 U9.1@106.642,88.482 ; U9.1@106.5,88.34 U9.1@106.642,88.482 ; U9.1@106.632,88.482 U9.1@106.642,88.482 ; C23.2@117.579,87.689 117.579,87.621 119.202,85.998 119.202,84.795 118.007,83.6 117.215,83.6 116.815,83.2 116.8,83.2 116.188,82.588 U2.4@116.188,81.868 116.188,80.288 115.5,79.6 114.272,79.6 R29.1@113.203,80.669 111.682,82.19 108.19,82.19 106.715,83.665 106.715,84.659 U4.2@106.665,84.709 106.665,88.459 U9.1@106.642,88.482
  Top Layer w0.6: USART.4@33.105,46.488 33.493,46.1 39.19,46.1 39.4,46.31 39.4,64.386 41.814,66.8 44,66.8 45.015,65.785 C302.2@45.015,65.383 47.881,65.383 C301.2@47.911,65.353 ; U6.6@62.105,91.313 64.127,93.335 C15.2@70.454,93.335 69.768,92.649 U8.1@69.768,90.795 U8.2@69.768,89.845 ; C38.2@87.046,92.71 87.046,91.619 R32.1@89.116,89.549 ; C37.2@87.046,95.195 C37.2@87.046,95.377 87.046,96.846 88.313,98.113 C22.1@92.799,98.113 C21.1@95.91,98.113 95.997,98.2 98.934,98.2 C20.1@99.021,98.113 102.072,98.113 C19.2@102.102,98.083 102.119,98.1 105.155,98.1 C18.2@105.172,98.083 ; C18.2@104.783,98.083 C18.2@105.172,98.083 ; 108.2,108.966 110.363,106.803 UOUT.2@110.363,106.426 ; UOUT.2@110.4,106.326 110.4,100.159 C17.2@108.324,98.083 C18.2@105.213,98.083 C18.2@105.172,98.083
  Top Layer w1: POWER.2@28.3,90.091 C10.2@43.016,90.091 47.294,90.091 48.516,91.313 U6.3@51.105,91.313 53.287,91.313 54,90.6 54,88.7 53.209,87.909 U6.5@51.105,87.909 49.7,86.504 49.7,83.359 D21.1@50.89,82.169 ; 3.3V.2@28.314,78.486 32.9,73.9 R10.1@32.9,70.525 ; 49.8,108.966 41.783,108.966 ADC7.2@39.243,106.426 48.969,96.7 56.718,96.7 U6.6@62.105,91.313 ; 49.834,108.966 55.2,108.966 60,108.966 67.183,108.966 86.498,108.966 ; ADC1.2@89.038,106.426 86.498,108.966 ; R32.1@89.116,89.259 R32.1@89.116,89.549 ; ADC0.2@100.589,106.813 98.436,108.966 ; C14.2@114.76,70.104 C12.2@120.825,70.104 ; U7.6@125.941,41.941 128.023,44.023 U7.6@128.1,44.1 ; U7.6@128.651,43.395 127.293,42.037 C13.2@116.395,42.037 112.7,45.732 112.7,54.3 115.257,56.857 D22.1@119.906,56.857 120.065,56.857 R50.2@123.113,59.905 ; U7.3@128.651,54.395 128.651,52.051 128,51.4 125.9,51.4 125.247,52.053 U7.5@125.247,54.395 125.247,56.853 123.113,58.987 R50.2@123.113,59.905 ; 86.498,108.966 98.436,108.966 ; 98.436,108.966 108.2,108.966 116.334,108.966 117.3,108 117.3,101.9 124.9,94.3 124.9,74.179 C12.2@120.825,70.104 ; C12.2@120.825,70.104 120.825,62.193 R50.2@123.113,59.905
  Bottom Layer w0.4: v1(46.8,106.7) 46.8,100.912 R510.2@48.626,99.087 ; C6.1@48.526,96.547 R510.2@48.526,98.987 ; v1(52,106.8) 52,100.412 R512.2@53.325,99.087 53.124,98.886 53.124,97.224 C7.1@53.801,96.547 ; v1(57,107) 57,100.924 R506.2@58.51,99.414 58.732,99.192 C4.1@58.732,96.747 ; v1(62.3,106.5) 62.3,100.767 63.812,99.255 C5.1@63.812,97.001 ; R504.2@68.739,100.965 68.739,104.4 ; ADC4.2@69.723,106.426 68.739,105.442 68.739,104.4 ; C3.1@72.136,103.124 70.015,103.124 68.739,104.4
  Bottom Layer w0.6: C2.2@37.926,98.887 37.926,101.721 R514.2@38.011,101.806 38.011,105.194 ; C11.2@42.164,79.169 44.731,79.169 45.514,78.386 66.1,78.386 73.263,78.386 Q12.2@75.536,80.659 ; 43.6,20.3 43.6,20.352 ; 55.3,20.3 55.367,20.3 ; UART.4@60.376,63.628 60.762,63.628 65.5,58.89 P12.5@74.13,58.89 75.521,58.89 77.248,57.163 C1.2@80.347,57.163 ; P12.5@74.448,58.572 cw(c75.216,57.804) 75.216,58.89 cw(c75.216,59.976) P12.5@74.448,59.208 ; R516.2@87.89,100.614 87.89,105.278 89.038,106.426 ADC1.2@90.043,106.426 ; C9.1@100.076,99.187 99.714,99.549 R518.2@99.714,101.847 99.714,105.164 ADC0.2@100.976,106.426 ; 102.7,20.3 102.7,20.36 X6.2@105.559,23.219
  Bottom Layer w1: 23,56.593 23,52.2 ; POWER.2@28.25,90.25 23,85 23,81.6 ; POWER.2@28.3,90.203 33.5,95.403 33.5,100.683 38.011,105.194 ADC7.2@39.243,106.426 ; 3.3V.2@28.313,78.386 35.886,78.386 36.669,79.169 C11.2@42.164,79.169 ; 5V.2@28.386,32.747 25.853,32.747 23,35.6 ; 3.3V.2@28.486,78.486 26.114,78.486 23,81.6 ; USART.4@33.105,46.488 28.712,46.488 23,52.2 ; X0.2@44.196,23.622 44.196,23.196 41.3,20.3 ; R510.2@48.526,98.987 R510.2@48.626,99.087 ; X1.2@54.356,23.622 54.356,23.556 51.1,20.3 ; 55.3,20.3 51.1,20.3 ; 55.367,20.3 61.194,20.3 ; X2.2@64.516,23.622 61.194,20.3 ; X3.2@74.676,23.622 71.4,20.346 71.446,20.3 ; X4.2@84.836,23.622 81.514,20.3 ; ADC1.2@89.662,106.426 91.44,104.648 C8.1@92.329,104.648 ; X5.2@94.996,23.622 91.674,20.3 ; X7.2@115.316,23.622 111.994,20.3 ; X8.2@125.476,23.622 122.154,20.3 ; X9.2@135.636,23.622 132.314,20.3 ; X10.2@145.796,23.622 142.474,20.3 ; X11.2@155.956,23.622 152.634,20.3 142.474,20.3 ; 23,35.6 23,31.8 34.5,20.3 41.3,20.3 ; 23,35.6 23,52.2 ; 23,52.2 23,81.6 ; 41.3,20.3 43.6,20.3 51.1,20.3 ; 61.194,20.3 71.446,20.3 ; 71.446,20.3 81.514,20.3 ; 81.514,20.3 91.674,20.3 ; 91.674,20.3 102.7,20.3 111.994,20.3 ; 111.994,20.3 122.154,20.3 ; 122.154,20.3 132.314,20.3 ; 132.314,20.3 142.474,20.3
  other v1: 159.3,29.8 50.1,30.1 58.1,30.3 80.8,30.5 40.8,37.6 126.4,42.3 128.7,42.3 130.3,42.3 126.5,44.4 128.7,44.4 130.3,44.4 89.4,55.3 87.9,56.6 91.1,56.6 89.4,57.7 59.3,88.5 61,88.6 62.2,88.6 59.3,89.7 61,89.7 62.2,89.7 161.8,95.8
IN0: C9.2 R517.2 R518.1 U4.6 | length 45.2
  Top Layer w0.4: U4.6@104.065,84.709 104.065,85.703 v2(104.862,86.5)
  Bottom Layer w0.4: C9.2@101.676,99.187 101.676,101.809 R518.1@101.714,101.847 R517.2@105.302,101.847 108.349,98.8 115.4,98.8 118.4,95.8 118.4,89.3 115.6,86.5 v2(104.862,86.5)
IN1: C8.2 R515.2 R516.1 U4.7 | length 56.9
  Top Layer w0.4: U4.7@103.415,84.709 103.415,86.364 v2(103.851,86.8)
  Bottom Layer w0.4: C8.2@92.329,103.048 91.44,103.048 89.89,101.498 R516.1@89.89,100.614 R515.2@93.097,100.614 95.011,98.7 98.922,98.7 99.46,98.162 102.292,98.162 102.33,98.2 108.411,98.2 109.211,97.4 115.4,97.4 117.68,95.12 117.68,89.48 115.364,87.164 104.215,87.164 v2(103.851,86.8)
IN2: R77.1 U4.8 | length 17.9
  Top Layer w0.4: U4.8@102.765,84.709 102.765,87.065 v2(103.4,87.7)
  Bottom Layer w0.4: v2(103.4,87.7) 103.464,87.764 113.18,87.764 R77.1@116.58,91.164
IN3: R76.1 U4.9 | length 16.2
  Top Layer w0.4: U4.9@102.115,84.709 102.115,87.215 v2(102.165,87.265)
  Bottom Layer w0.4: v2(102.165,87.265) 102.165,87.765 102.764,88.364 111.062,88.364 R76.1@113.862,91.164
IN4: R75.1 U4.10 | length 14.5
  Top Layer w0.4: U4.10@101.465,84.709 101.465,86.465 v2(101.5,86.5)
  Bottom Layer w0.4: v2@101.465,86.535 101.465,87.965 102.464,88.964 108.944,88.964 R75.1@111.144,91.164 R75.1@111.144,90.944
IN5: R74.1 U4.11 | length 12.5
  Top Layer w0.4: v2(100.8,87.3) 100.8,84.724 U4.11@100.815,84.709
  Bottom Layer w0.4: v2(100.8,87.3) 100.8,87.5 100.865,87.565 100.865,88.214 102.215,89.564 107.064,89.564 108.427,90.927 R74.1@108.427,91.164
IN6: R73.1 U4.12 | length 10.4
  Top Layer w0.4: v2(100.1,87.9) 100.165,87.835 U4.12@100.165,84.709
  Bottom Layer w0.4: v2(100.1,87.9) 100.2,88.4 101.964,90.164 104.709,90.164 R73.1@105.709,91.164
IN7: R72.1 U4.13 | length 8.4
  Top Layer w0.4: v2(99.5,88.5) 99.515,88.485 99.515,88.164 99.5,88.149 99.5,84.724 U4.13@99.515,84.709
  Bottom Layer w0.4: v2(99.5,88.5) 99.5,88.549 102.115,91.164 R72.1@102.991,91.164
ITEST: ADC4.1 R503.1 U8.6 | length 22.4
  Top Layer w0.6: U8.6@72.568,90.795 74.803,93.03 ADC4.1@74.803,106.426
  Bottom Layer w0.4: ADC4.1@74.803,106.426 74.803,103.397 75.819,102.381 R503.1@75.819,100.965
MCUVCC: C1.1 P12.3 SW.3 SW.6 U1.14 | length 33.7
  Top Layer w0.4: SW.6@67.349,53.625 67.349,57.189 P12.3@74.13,63.97 ; v1(81.744,58.763) 83.545,58.763 U1.14@83.555,58.773
  Bottom Layer w0.4: SW.3@67.349,48.625 SW.6@67.349,53.625 ; P12.3@74.13,63.42 cw(c74.13,62.092) 75.069,63.031 cw(c76.008,63.97) P12.3@74.68,63.97 ; P12.3@74.13,63.97 79.337,58.763 C1.1@80.474,58.763 v1(81.744,58.763) ; C1.1@80.122,58.586 ccw(c79.695,58.159) 79.695,58.763 ccw(c79.695,59.367) C1.1@80.122,58.94 ; C1.1@80.826,58.586 cw(c81.253,58.159) 81.253,58.763 cw(c81.253,59.367) C1.1@80.826,58.94
NC1: RELAY1.5 RELAY1.6 | length 5.1
  Top Layer w0.8: RELAY1.6@150.876,32.385 RELAY1.5@150.876,37.465
NC2: RELAY2.5 RELAY2.6 | length 5.1
  Top Layer w0.8: RELAY2.6@150.876,41.783 RELAY2.5@150.876,46.863
NC3: RELAY3.5 RELAY3.6 | length 5.1
  Top Layer w0.8: RELAY3.6@150.749,51.181 RELAY3.5@150.749,56.261
NC4: RELAY4.5 RELAY4.6 | length 5.1
  Top Layer w0.8: RELAY4.6@150.749,60.579 RELAY4.5@150.749,65.659
NC7: RELAY7.5 RELAY7.6 | length 5.1
  Top Layer w0.6: RELAY7.6@150.749,70.421 RELAY7.5@150.749,75.501
NC8: RELAY8.5 RELAY8.6 | length 5.1
  Top Layer w0.6: RELAY8.6@150.749,80.264 RELAY8.5@150.749,85.344
NetAD3_1: AD3.1 R507.1 | length 4.8
  Bottom Layer w0.4: AD3.1@64.643,106.426 65.844,105.225 R507.1@65.844,102.081
NetAD3_2: AD3.2 R505.1 | length 4.8
  Bottom Layer w0.4: R505.1@58.478,102.081 58.478,105.341 AD3.2@59.563,106.426
NetAD5_1: AD5.1 R511.1 | length 4.8
  Bottom Layer w0.4: AD5.1@54.483,106.426 55.452,105.457 R511.1@55.452,102.008
NetAD5_2: AD5.2 R509.1 | length 4.7
  Bottom Layer w0.4: R509.1@48.636,102.008 48.636,105.659 AD5.2@49.403,106.426
NetADC0_1: ADC0.1 R517.1 | length 5.1
  Bottom Layer w0.4: ADC0.1@106.056,106.426 107.302,105.18 R517.1@107.302,101.847
NetADC1_1: ADC1.1 R515.1 | length 6.2
  Bottom Layer w0.4: ADC1.1@94.118,106.426 95.097,105.447 R515.1@95.097,100.614
NetADC7_1: ADC7.1 R513.1 | length 5.1
  Bottom Layer w0.4: ADC7.1@44.323,106.426 45.472,105.277 R513.1@45.472,101.806
NetC13_1: C13.1 L11.2 L12.1 R51.1 | length 39.7
  Top Layer w1: L11.2@111.3,53.34 111.3,42.132 C13.1@111.395,42.037
  Bottom Layer w1: L11.2@111.3,53.34 111.3,61.008 L12.1@112.014,61.722 112.314,61.722 114.392,63.8 125.4,63.8 127.263,61.937 R51.1@130.066,61.937
NetC14_1: C14.1 L12.2 UOUT.1 | length 56.8
  Top Layer w1: L12.2@115.014,61.722 111.778,64.958 111.778,70.086 C14.1@111.76,70.104 114.956,73.3 120,73.3 122.8,76.1 122.8,91.5 115.1,99.2 115.1,105.926 UOUT.1@115.5,106.326
NetC19_1: C19.1 C20.2 L1.1 U9.2 U9.4 | length 19.8
  Top Layer w0.4: U9.4@101.054,90.454 U9.4@101.054,90.782 U9.2@106.642,90.782
  Top Layer w0.6: U9.4@101.054,90.782 100.072,89.8 98.3,89.8 97.498,90.602 L1.1@97.498,92.292 99.021,93.815 C20.2@99.021,96.513 102.072,96.513 C19.1@102.102,96.483
NetC23_1: C23.1 R30.2 R31.1 U2.8 | length 24.9
  Top Layer w0.4: R31.1@113.203,77.748 114.155,78.7 119.5,78.7 119.998,78.202 U2.8@119.998,76.458 121.3,77.76 121.3,85.4 119.179,87.521 C23.1@119.179,87.689 119.528,88.038 R30.2@119.528,90.61
NetC37_1: C37.1 U4.19 Y21.1 | length 24.4
  Top Layer w0.4: C37.1@88.646,95.377 88.646,95.24 94.234,89.652 Y21.1@94.234,85.471 ; Y21.1@94.234,85.266 Y21.1@94.234,85.471 ; U4.19@101.465,77.809 101.465,80.535 100.4,81.6 98.105,81.6 Y21.1@94.234,85.471
NetC38_1: C38.1 U4.18 Y21.2 | length 23.5
  Top Layer w0.4: 89.535,92.71 92.7,89.545 92.7,82.125 Y21.2@94.234,80.591 ; Y21.2@94.325,80.5 Y21.2@94.234,80.591 ; U4.18@100.815,77.809 100.815,79.985 99.8,81 94.643,81 Y21.2@94.234,80.591
NetC301_1: C301.1 U100.7 Y20.1 | length 17.2
  Top Layer w0.4: U100.7@48.422,52.208 49.565,52.208 50.1,52.743 50.1,58.933 Y20.1@48.722,60.311 49.511,61.1 C301.1@49.511,65.353 ; U100.7@49.172,52.258 ccw(c49.172,53.327) 49.928,52.571 ; C301.1@49.334,65.001 cw(c48.907,64.574) 49.511,64.574 cw(c50.115,64.574) C301.1@49.688,65.001
NetC302_1: C302.1 U100.8 Y20.2 | length 19
  Top Layer w0.4: C302.1@43.238,65.031 cw(c42.811,64.604) 43.415,64.604 cw(c44.019,64.604) C302.1@43.592,65.031 ; 43.415,61.138 C302.1@43.415,65.383 ; Y20.2@43.515,60.638 Y20.2@43.842,60.311 43.842,55.64 46.004,53.478 U100.8@48.422,53.478 ; 43.515,61.553 ccw(c45.084,61.553) Y20.2@43.975,60.444 ; 43.515,62.519 ccw(c46.05,62.519) Y20.2@44.257,60.726
NetC304_2: C304.2 U100.4 | length 11.9
  Top Layer w0.3: U100.4@48.422,48.398 49.565,48.398 51.343,50.176 51.343,55.383 51.597,55.637 C304.2@52.4,55.637 ; U100.4@49.172,48.198 ccw(c49.172,48.664) 49.501,48.334 ; U100.4@49.172,48.498 ccw(c49.172,49.688) 50.014,48.847 ; C304.2@52.294,55.531 ccw(c52.038,55.275) 52.038,55.637 ccw(c52.038,55.999) C304.2@52.294,55.743
NetD21_2: D21.2 L10.1 U6.2 | length 22.8
  Top Layer w1: U6.2@51.105,93.015 53.685,93.015 55.64,91.06 D21.2@55.64,82.169 55.64,77.775 L10.1@52.668,74.803
NetD22_2: D22.2 L11.1 U7.2 | length 21.1
  Top Layer w1: L11.1@114.3,53.34 114.44,53.2 118.813,53.2 D22.2@119.906,52.107 122.014,49.999 129.099,49.999 130.353,51.253 U7.2@130.353,54.395
NetLED20_2: LED20.2 R10.2 | length 3.3
  Top Layer w0.6: LED20.2@32.98,65.105 R10.2@32.98,68.445
NetLED301_1: LED301.1 R301.1 | length 5.6
  Top Layer w0.3: R301.1@52.422,53.06 cw(c51.798,52.436) 52.68,52.436 ; LED301.1@52.433,51.562 ccw(c51.835,52.16) 52.68,52.16 ccw(c53.525,52.16) LED301.1@52.927,51.562 ; LED301.1@52.68,50.811 LED301.1@52.68,51.065 R301.1@52.68,53.418 ; 52.68,52.147 cw(c53.971,52.147) R301.1@53.058,53.06
NetLED302_1: LED302.1 R302.1 | length 5.3
  Top Layer w0.4: R302.1@52.457,44.463 ccw(c51.774,45.146) 52.74,45.146 ccw(c53.706,45.146) R302.1@53.023,44.463 ; LED302.1@52.468,46.285 cw(c51.811,45.628) 52.74,45.628 ; LED302.1@52.68,46.747 52.74,46.687 R302.1@52.74,44.08 ; 52.74,45.918 cw(c53.259,45.918) LED302.1@52.892,46.285
NetLED303_1: LED303.1 R303.2 | length 7.2
  Top Layer w0.3: LED303.1@65.463,64.916 cw(c64.865,64.318) 65.71,64.318 cw(c66.555,64.318) LED303.1@65.957,64.916 ; LED303.1@65.71,65.413 65.71,64.238 R303.2@67.837,62.111 ; 66.898,63.05 ccw(c67.837,63.989) R303.2@67.837,62.661 ; 67.14,62.808 cw(c66.542,62.211) R303.2@67.387,62.211
NetLED304_1: LED304.1 R304.2 | length 6.6
  Top Layer w0.4: LED304.1@65.71,69.35 67.837,71.477 ; LED304.1@65.71,69.9 ccw(c65.71,71.228) 66.649,70.289 ; R304.2@67.558,72.138 cw(c66.914,71.477) 67.837,71.477 ; R304.2@67.837,72.525 67.837,71.477 ; R304.2@68.116,72.138 ccw(c68.76,71.477) 67.837,71.477
NetLED600_1: LED600.1 R11.1 | length 5.1
  Top Layer w0.6: LED600.1@138.402,37.053 138.462,36.993 R11.1@138.462,32.004
NetLED600_2: LED600.2 Q1.3 RELAY1.1 | length 9.6
  Top Layer w0.6: LED600.2@140.602,37.053 141.014,37.465 RELAY1.1@145.796,37.465
  Bottom Layer w0.6: Q1.3@141.637,37.315 141.787,37.465 RELAY1.1@145.796,37.465
NetLED601_1: LED601.1 R12.1 | length 5.1
  Top Layer w0.6: LED601.1@138.402,46.99 138.462,46.93 R12.1@138.462,41.942
NetLED601_2: LED601.2 Q3.3 RELAY2.1 | length 9.5
  Top Layer w0.6: LED601.2@140.602,46.99 145.669,46.99 RELAY2.1@145.796,46.863
  Bottom Layer w0.6: Q3.3@141.637,47.175 145.484,47.175 RELAY2.1@145.796,46.863